# Altium PCB A4950.PcbDoc
Units mil, origin at the board's own origin, x right, y up, seen from the top; angles counter-clockwise.
Board outline 6000 x 4000 mil, 2 copper layers (Top Layer, Bottom Layer); 14 components, 23 nets, 72 pads, 20 vias.
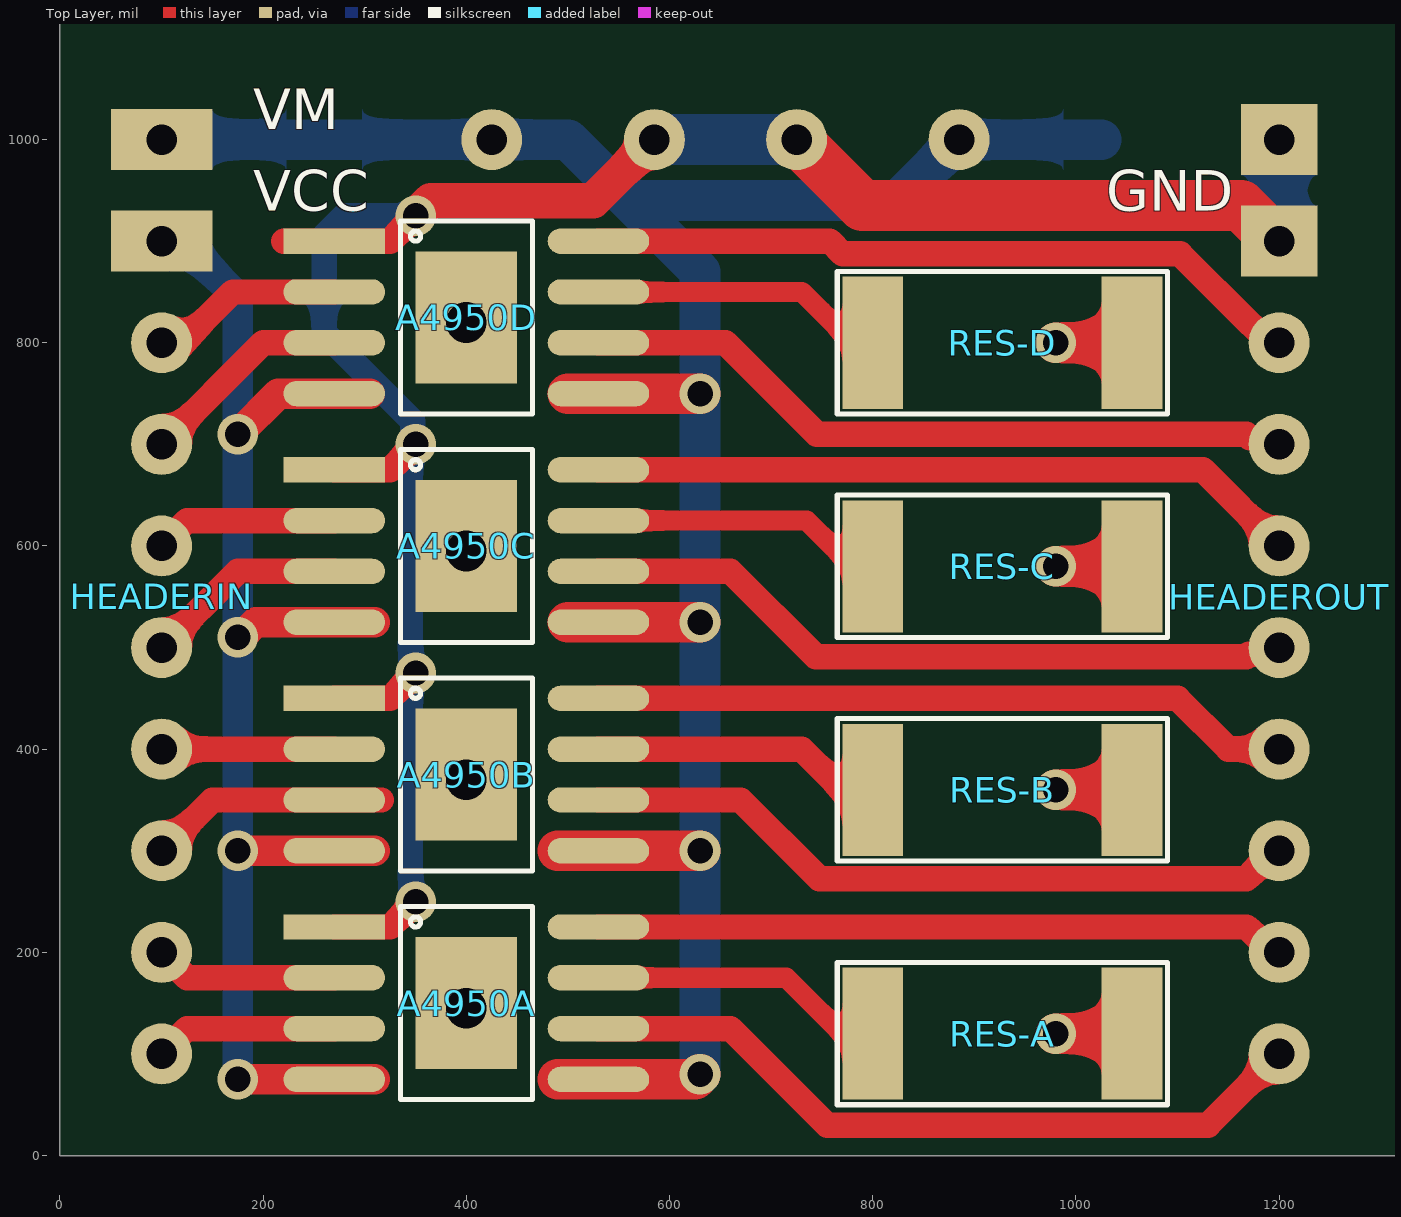
[diagram p0: Top Layer view]
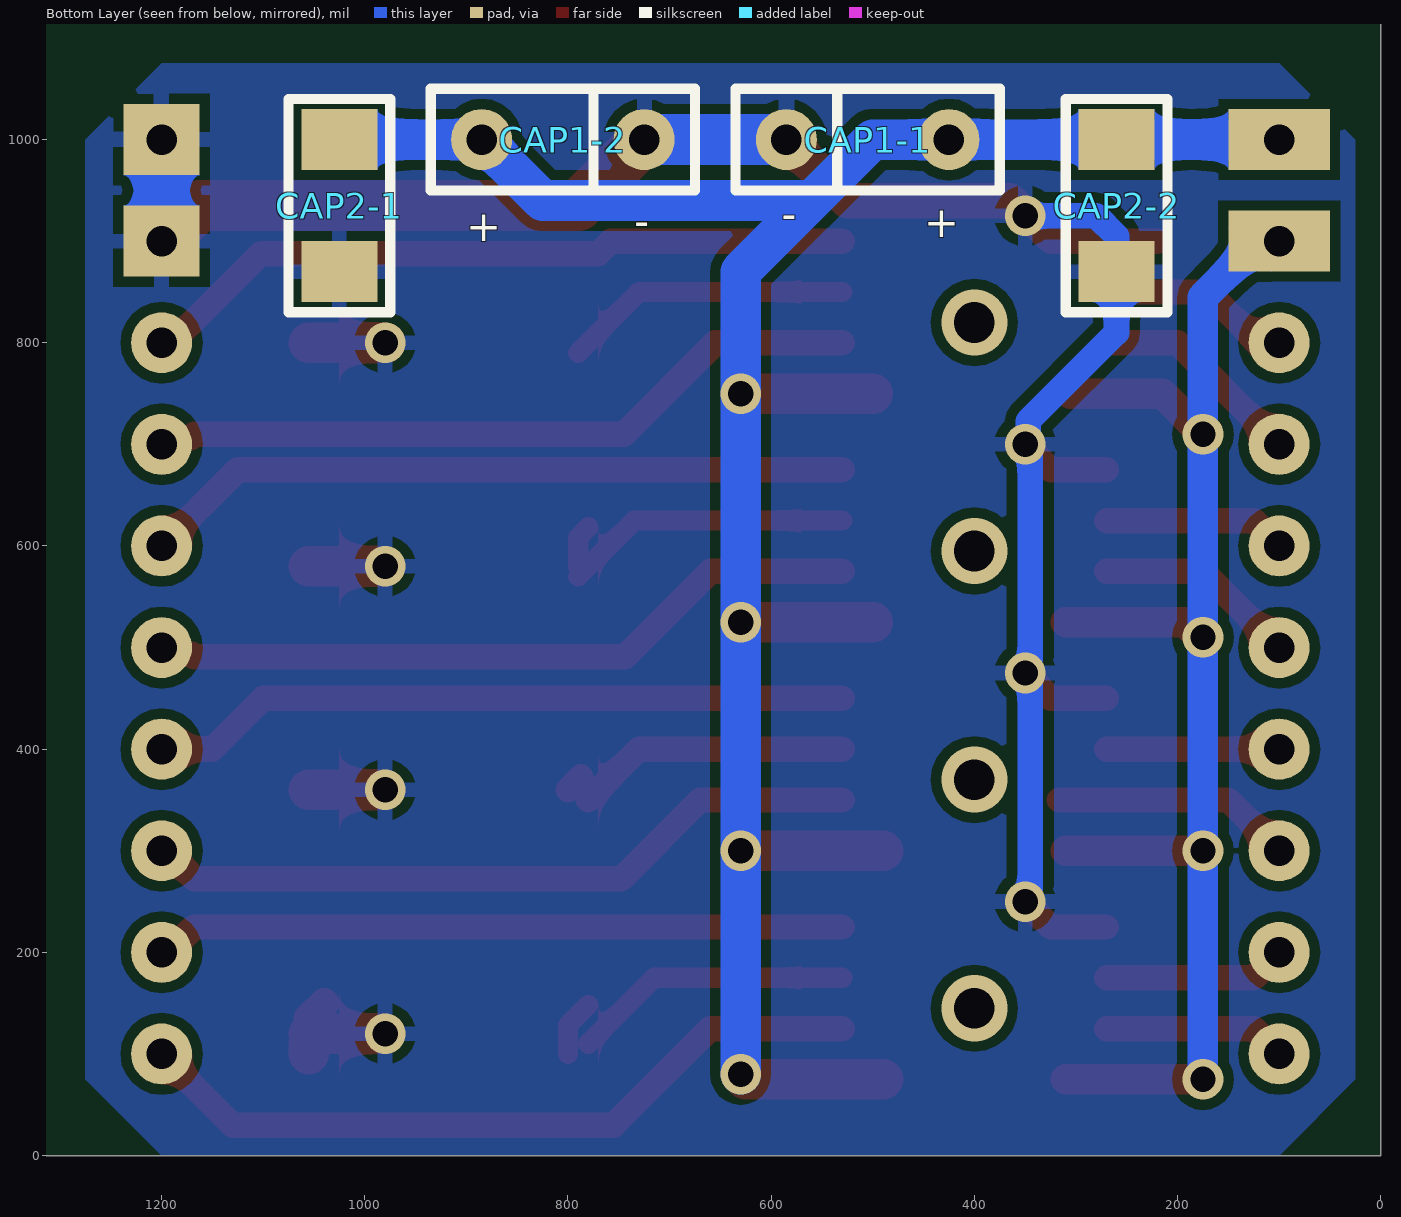
[diagram p1: Bottom Layer view, seen from below]

## Layer stack, top to bottom
Top Solder: solder mask 0.4, Solder Resist, Dk 3.5
Top Layer: signal copper 1.4
Dielectric 1: dielectric 12.6, FR-4, Dk 4.8
Bottom Layer: signal copper 1.4
Bottom Solder: solder mask 0.4, Solder Resist, Dk 3.5

## Board outline
0,0 6000,0 6000,4000 0,4000

## Design rules (kind name [scope] priority, off if disabled: settings)
Clearance [All] p1: gap=10 ignorepadtopadclearanceinfootprint=FALSE except(0: Arc-Hole Track-Hole SMDPad-Hole THPad-Hole Via-Hole Fill-Hole Poly-Hole Region-Hole Text-Hole)
PlaneConnect [All] p1: planeconnectstyle=Relief reliefexpansion=20 reliefentries=4 reliefconductorwidth=15 reliefairgap=10
PolygonConnect [All] p1: connectstyle=Relief reliefconductorwidth=15 reliefentries=4 polygonreliefangle="90 Angle" airgapwidth=10
RoutingVias [All] p1: holewidth=25 width=40 viastyle="Through Hole" minholewidth=20 minwidth=30 maxholewidth=50 maxwidth=70
SolderMaskExpansion [All] p1: expansion=4 istentingtop=FALSE
Width [All] p1: maxlimit=50 minlimit=10 preferedwidth=25 minimp=50.000000 maximp=50.000000 favimp=50.000000
29 further rules are at their usual default settings.

## Components (designator, comment, footprint, x,y, rotation, side; value= is the part's Value field where it differs from the comment)
A4950A "A4950A" A4950 270,225 r0 top
A4950B "A4950B" A4950 270,450 r0 top
A4950C "A4950C" A4950 270,675 r0 top
A4950D "A4950D" A4950 270,900 r0 top
CAP1-1 "220uF" CAP1 505,1000 r0 bottom
CAP1-2 "220uF" CAP1 805,1000 r180 bottom
CAP2-1 "0.1uF" CAP2 1075,830 r90 bottom
CAP2-2 "0.1uF" CAP2 310,830 r90 bottom
HEADERIN "HEADERIN" HEADERIN 100,1000 r0 top locked
HEADEROUT "HEADEROUT" HEADEROUT 1200,100 r180 top
RES-A "0.25R" RES2512 800,120 r0 top
RES-B "0.25R" RES2512 800,360 r0 top
RES-C "0.25R" RES2512 800,580 r0 top
RES-D "0.25R" RES2512 800,800 r0 top

## Footprints (in the part's own frame and the unit in brackets; to place one, negate y for a bottom-side part, rotate by r counter-clockwise, add the part's x,y. Pads: shape width x height; smd on the part's side, far side on the other; paste and mask are expansions set on the pad)
A4950 [mil]
  rect 100x130 smd: EP(130,-75)
  rect 100x25 smd: GND(0,0)
  oval 100x25 smd: IN1(0,-100) IN2(0,-50) LSS(260,-50) OUT1(260,-100) OUT2(260,0) VBB(260,-150) VREF(0,-150)
  silkscreen extent 65,-170 195,20
CAP1 [mil]
  round 60 hole 30: C+(-80,0) C-(80,0)
  silkscreen extent -130,-50 130,50
CAP2 [mil]
  rect 60x75 smd: C1(40,-50) C2(170,-50)
  silkscreen extent 0,-100 210,0
HEADERIN [mil]
  rect 100x60 hole 30: 5V(0,-100) 12V(0,0)
  round 60 hole 30: AIN1(0,-900) AIN2(0,-800) BIN1(0,-700) BIN2(0,-600) CIN1(0,-500) CIN2(0,-400) DIN1(0,-300) DIN2(0,-200)
HEADEROUT [mil]
  round 60 hole 30: AOUT1(0,0) AOUT2(0,-100) BOUT1(0,-200) BOUT2(0,-300) COUT1(0,-400) COUT2(0,-500) DOUT1(0,-600) DOUT2(0,-700)
  rect 75x70 hole 30: GND(0,-800) GND(0,-900)
RES2512 [mil]
  rect 60x130 smd: R1(0,0) R2(255,0)
  silkscreen extent -35,-70 290,70

## Part data
A4950A A4950B A4950C A4950D: library part A4950
CAP1-1 CAP1-2: library part CAP1
CAP2-1 CAP2-2: library part CAP2
RES-A RES-B RES-C RES-D: library part RES

## Via types
v1: diameter 40, hole 25, Top Layer to Bottom Layer, 16 vias
v2: diameter 65, hole 40, Top Layer to Bottom Layer, 4 vias

## Nets (pads, with @x,y where several pads share a name; then routed paths per layer and width w, separated by ;. In a path a pad name is that pad's centre, name@x,y a point inside that pad or via, vN(x,y) a via of type N, cw(c..) or ccw(c..) an arc to the next point about the centre after c; other vN are vias at no path point)
+5: A4950A.VREF A4950B.VREF A4950C.VREF A4950D.VREF HEADERIN.5V | length 1425.6
  Top Layer w30: v1(175,75) A4950A.VREF A4950A.VREF@310,75 ; v1(175,300) A4950B.VREF A4950B.VREF@310,300 ; v1(175,510) 177.71,510 192.71,525 A4950C.VREF A4950C.VREF@310,525 ; v1(175,710) 215,750 A4950D.VREF A4950D.VREF@305,750
  Bottom Layer w30: HEADERIN.5V 120,900 175,845 v1(175,710) v1(175,510) v1(175,300) v1(175,75)
AI1: A4950A.IN1 HEADERIN.AIN1 | length 180.4
  Top Layer w25: HEADERIN.AIN1 125,125 A4950A.IN1
AI2: A4950A.IN2 HEADERIN.AIN2 | length 180.4
  Top Layer w25: HEADERIN.AIN2 125,175 A4950A.IN2
AO1: A4950A.OUT1 HEADEROUT.AOUT1 | length 741.9
  Top Layer w25: A4950A.OUT1 660,125 755,30 1130,30 HEADEROUT.AOUT1
  Bottom Layer w25: HEADEROUT.AOUT1@1197.5,97.5 HEADEROUT.AOUT1
AO2: A4950A.OUT2 HEADEROUT.AOUT2 | length 680.4
  Top Layer w25: A4950A.OUT2 1167.86,225 1192.86,200 HEADEROUT.AOUT2
BI1: A4950B.IN1 HEADERIN.BIN1 | length 237.2
  Top Layer w25: HEADERIN.BIN1 150,350 A4950B.IN1 A4950B.IN1@316.5,350
BI2: A4950B.IN2 HEADERIN.BIN2 | length 170
  Top Layer w25: HEADERIN.BIN2 A4950B.IN2
BO1: A4950B.OUT1 HEADEROUT.BOUT1 | length 713.5
  Top Layer w25: A4950B.OUT1 670,350 747.5,272.5 1167.86,272.5 1195.36,300 HEADEROUT.BOUT1
BO2: A4950B.OUT2 HEADEROUT.BOUT2 | length 690.7
  Top Layer w25: A4950B.OUT2 1100,450 1150,400 HEADEROUT.BOUT2
CI1: A4950C.IN1 HEADERIN.CIN1 | length 201.1
  Top Layer w25: HEADERIN.CIN1 175,575 A4950C.IN1
CI2: A4950C.IN2 HEADERIN.CIN2 | length 180.4
  Top Layer w25: HEADERIN.CIN2 125,625 A4950C.IN2
CO1: A4950C.OUT1 HEADEROUT.COUT1 | length 708.5
  Top Layer w25: A4950C.OUT1 660,575 744,491 1167.86,491 1170.16,493.3 1193.3,493.3 HEADEROUT.COUT1
CO2: A4950C.OUT2 HEADEROUT.COUT2 | length 701.1
  Top Layer w25: A4950C.OUT2 1125,675 HEADEROUT.COUT2
DI1: A4950D.IN1 HEADERIN.DIN1 | length 211.4
  Top Layer w25: HEADERIN.DIN1 200,800 A4950D.IN1
DI2: A4950D.IN2 HEADERIN.DIN2 | length 190.7
  Top Layer w25: HEADERIN.DIN2 106.7,806.7 126.7,806.7 170,850 A4950D.IN2
DO1: A4950D.OUT1 HEADEROUT.DOUT1 | length 711.4
  Top Layer w25: A4950D.OUT1 655,800 745,710 1167.86,710 1171.16,706.7 1193.3,706.7 HEADEROUT.DOUT1
DO2: A4950D.OUT2 HEADEROUT.DOUT2 | length 711.4
  Top Layer w25: A4950D.OUT2 757.82,900 770.32,887.5 1102.5,887.5 1172.5,817.5 1173.03,817.5 1190.53,800 HEADEROUT.DOUT2
GND: A4950A.GND A4950B.GND A4950C.GND A4950D.GND CAP1-1.C- CAP1-2.C- CAP2-1.C1 CAP2-2.C1 HEADEROUT.GND RES-A.R2 RES-B.R2 RES-C.R2 RES-D.R2 | length 2583.7
  Top Layer w25: A4950D.GND@220,900 A4950D.GND 325,900 v1(350,925) ; A4950A.GND 325,225 v1(350,250) ; A4950B.GND 325,450 v1(350,475) ; A4950C.GND 325,675 v1(350,700)
  Top Layer w30: RES-A.R2@1040,150 1055,135 RES-A.R2
  Top Layer w35: v1(350,925) 365,940 525,940 CAP1-1.C-
  Top Layer w40: v1(980,120) RES-A.R2@1045,120 ; v1(980,360) RES-B.R2 ; v1(980,580) RES-C.R2 ; v1(980,800) RES-D.R2 ; RES-A.R2@1055,100 1055,110 RES-A.R2@1045,120 ; RES-A.R2 RES-A.R2@1045,120
  Top Layer w50: CAP1-2.C- 790,935 1162.5,935 1197.5,900 HEADEROUT.GND@1200,900
  Bottom Layer w25: v1@345,465.94 345,265.61 347.13,263.48 347.13,252.87 v1(350,250) ; v1(350,475) 347.13,477.87 v1@347.13,480.01 ; v1@350,477.14 v1@347.13,480.01 ; v1(350,925) 280,925 260,905 CAP2-2.C1 260,810 347.13,722.87 347.13,693.07 345,690.94 345,490.61 347.13,488.48 v1@347.13,480.01
  Bottom Layer w50: CAP1-1.C- CAP1-2.C- ; HEADEROUT.GND@1200,900 HEADEROUT.GND@1200,1000
NetA4950A_LSS: A4950A.LSS RES-A.R1 | length 333.5
  Top Layer w20: A4950A.LSS 715,175 RES-A.R1@780,110 ; RES-A.R1@780,148.28 800,128.28 RES-A.R1 RES-A.R1@800,100
NetA4950B_LSS: A4950B.LSS RES-B.R1 | length 288.9
  Top Layer w25: A4950B.LSS 730,400 RES-B.R1@780,350 ; RES-B.R1@787.14,372.86 RES-B.R1
NetA4950C_LSS: A4950C.LSS RES-C.R1 | length 325.2
  Top Layer w20: A4950C.LSS 735,625 RES-C.R1@790,570 ; RES-C.R1@780,618.28 790,608.28 RES-C.R1@790,580
NetA4950D_LSS: A4950D.LSS RES-D.R1 | length 284.9
  Top Layer w20: A4950D.LSS 730,850 RES-D.R1@790,790
VBAT: A4950A.VBB A4950B.VBB A4950C.VBB A4950D.VBB CAP1-1.C+ CAP1-2.C+ CAP2-1.C2 CAP2-2.C2 HEADERIN.12V | length 2405.6
  Top Layer w40: A4950A.VBB@490,75 A4950A.VBB 625,75 v1(630,80) ; A4950B.VBB@490,300 A4950B.VBB v1(630,300) ; A4950C.VBB@500,525 A4950C.VBB v1(630,525) ; A4950D.VBB@500,750 A4950D.VBB v1(630,750)
  Bottom Layer w40: HEADERIN.12V CAP2-2.C2 CAP1-1.C+ 500,1000 630,870 v1(630,750) v1(630,525) v1(630,300) v1(630,80) ; 560.15,940 825,940 CAP1-2.C+ CAP2-1.C2
pads on no net: A4950A.EP A4950B.EP A4950C.EP A4950D.EP
copper on no net:
  other v2: 400,145 400,370 400,595 400,820

## Polygon pours and split planes (outlines as drawn)
GND on Bottom Layer "GND_L02_P-001" (solid, remove dead copper, pour order 0): 100,1075 25,1000 25,75 100,0 1200,0 1275,75 1275,1000 1200,1075

## Silkscreen, mask and mechanical layers (free items; w line width, h text height)
Top Overlay:
  region: 315,940
  text "VM" at 190,1010 h40
  text "VCC" at 190,930 h40
  text "GND" at 1030,930 h40
Mechanical 1:
  lines w10: 25,75 ccw(c100,75) 100,0 1200,0 ccw(c1200,75) 1275,75 1275,1000 ccw(c1200,1000) 1200,1075 100,1075 ccw(c100,1000) 25,1000 25,75

## Text inside footprints (layer, text, board x,y; h text height)
CAP1-1: Bottom Overlay "+" at 415,930 h30 r180; Bottom Overlay "-" at 575,935 h30 r180
CAP1-2: Bottom Overlay "+" at 900,900 h30; Bottom Overlay "-" at 735,905 h30